# EAGLE board Ejercicio1_Lab7_Digi1 (EAGLE 7.6.0)

Size 56.82 x 53.33 mm. Coordinates in mm from the lower left corner, seen from the top.
Outline: 0,0 56.82,0 56.82,53.33 0,53.33 0,0
Copper layers (1*16): Top 0.035mm / dielectric 1.5mm / Bottom 0.035mm
Design rules "default": minimum track width 10mil, minimum drill 24mil, track to track 8mil, track to pad 8mil, pad to pad 8mil, via to via 8mil, smd to smd 8mil, copper to edge 40mil, drill to drill 8mil, minimum pad ring 10mil, minimum via ring 8mil, stop-mask expansion 4mil, vias tented up to drill 0mil, thermal gap 10mil

## Footprints (pad centres in the part's own frame; a part is rotated, then mirrored left to right if it is on the bottom)
LED5MM = drill 0.813 octagon: A -1.27,0; K 1.27,0
DC-POWER = drill 0.889 pad 2.54 octagon: + 0,2.54; - 0,-2.54
2P-2.54-65/35MIL = drill 0.889 pad 1.651 square: 1 0,1.27 | drill 0.889 pad 1.651: 2 0,-1.27
0207/10 = drill 0.813 octagon: 1 -5.08,0; 2 5.08,0
TL1105 = drill 1 pad 1.676: 1 -2.25,3.25; 2 2.25,3.25; 3 -2.25,-3.25; 4 2.25,-3.25
DIL14 = drill 0.813 long: 1 -7.62,-3.81; 2 -5.08,-3.81; 3 -2.54,-3.81; 4 0,-3.81; 5 2.54,-3.81; 6 5.08,-3.81; 7 7.62,-3.81; 8 7.62,3.81; 9 5.08,3.81; 10 2.54,3.81; 11 0,3.81; 12 -2.54,3.81; 13 -5.08,3.81; 14 -7.62,3.81

## Placement (x,y rotation side)
D2  [LED5MM]  5,238.68 0 top  (outside the outline)
D3  [LED5MM]  5,251.38 0 top  (outside the outline)
D4  [LED5MM]  5,264.08 0 top  (outside the outline)
FUNC1  [DC-POWER]  5,22.78 0 top
P1  5V  [2P-2.54-65/35MIL]  5,10.08 0 top
R1  1k‎Ω  [0207/10]  5,60.88 0 top  (outside the outline)
R2  1k‎Ω  [0207/10]  5,86.28 0 top  (outside the outline)
R4  1k‎Ω  [0207/10]  5,175.18 0 top  (outside the outline)
R6  1k‎Ω  [0207/10]  5,200.58 0 top  (outside the outline)
R7  1k‎Ω  [0207/10]  5,213.28 0 top  (outside the outline)
R8  1k‎Ω  [0207/10]  5,225.98 0 top  (outside the outline)
S1  [TL1105]  5,48.18 0 top
S2  [TL1105]  5,73.58 0 top  (outside the outline)
S3  [TL1105]  5,111.68 0 top  (outside the outline)
U1  [DIL14]  5,35.48 0 top
U2  [DIL14]  5,149.78 0 top  (outside the outline)
U3  [DIL14]  5,98.98 0 top  (outside the outline)
U5  [DIL14]  5,124.38 0 top  (outside the outline)
U6  [DIL14]  5,137.08 0 top  (outside the outline)
U7  [DIL14]  5,187.88 0 top  (outside the outline)
U8  [DIL14]  5,162.48 0 top  (outside the outline)

## Library data of the parts
D2-D4 FUNC1 P1 R1 R2 R4 R6-R8 S1-S3 U1-U3 U5-U8 = AUTODESK_CIRCUITS_BREADBOARD

## Nets
N$1: U1.6 U3.1
N$2: U1.9
N$3: U1.12
N$4: U1.5
N$5: U1.8
N$6: U1.11
N$7: U3.5
N$8: U3.9
N$9: U3.11
N$10: U3.12
N$11: U3.4
N$12: U3.6
N$13: U3.8
N$14: U3.10
N$15: U3.13
N$16: U1.10
N$17: R1.2 S1.3 U1.1
N$18: S2.1
N$19: S1.1
N$20: S3.2
N$21: S3.1
N$22: R4.2 S3.3 U5.1 U5.13
N$23: U5.6
N$24: S1.2
N$25: S2.2
N$26: U1.13
N$27: D3.A U2.13 U5.9 U7.13 U8.13
N$28: U2.6
N$29: U2.10
N$30: U2.8
N$31: U2.12 U6.3
N$32: U2.9
N$33: U2.4
N$34: U2.11 U5.12
N$35: U2.5
N$36: U2.3 U5.2
N$37: U2.2 U3.3 U6.2
N$38: U6.5
N$39: U6.9
N$40: U6.11
N$41: U6.12
N$42: U6.4
N$43: U6.6
N$44: U6.8
N$45: U6.10
N$46: U6.13
N$47: U5.8
N$48: U7.1
N$49: U7.3
N$50: U7.5
N$51: D2.A U7.11
N$52: U7.4
N$53: U7.2
N$54: U7.6
N$55: U7.8
N$56: U7.9
N$57: U7.10
N$58: U8.1
N$59: U8.2
N$60: U8.3
N$61: U8.5
N$62: U8.9
N$63: P1.2 R1.1 R4.1 S2.4 U1.4 U1.14 U2.14 U3.14 U5.4 U5.10 U5.14 U6.14 U7.14 U8.14
N$64: D4.A U8.11
N$65: U8.4
N$66: U8.6
N$67: U8.8
N$68: U8.10
N$69: FUNC1.- P1.1 R2.1 R6.1 R7.2 R8.2 S1.4 S3.4 U1.7 U2.7 U3.7 U5.7 U6.7 U7.7 U8.7
N$70: D2.K R6.2
N$71: D3.K R7.1
N$72: D4.K R8.1
N$73: U2.1 U5.5 U6.1 U7.12 U8.12
N$74: R2.2 S2.3 U1.2 U3.2
N$75: FUNC1.+ U1.3 U5.3 U5.11

## Tracks (layer width: path | path; a pad name or v marks a point on that pad's centre or on a via)
N$1  (1 unrouted)
N$17  (2 unrouted)
N$22  (3 unrouted)
N$27  (4 unrouted)
N$31  (1 unrouted)
N$34  (1 unrouted)
N$36  (1 unrouted)
N$37  (2 unrouted)
N$51  (1 unrouted)
N$63  (13 unrouted)
N$64  (1 unrouted)
N$69  (14 unrouted)
N$70  (1 unrouted)
N$71  (1 unrouted)
N$72  (1 unrouted)
N$73  (4 unrouted)
N$74  (3 unrouted)
N$75  (3 unrouted)